# Altium PCB TFT_Adapter_Board_拼版.PcbDoc (part 6 of 9)
Units mm, origin at the board's own origin, x right, y up, seen from the top; angles counter-clockwise.
Board outline 137 x 166.56 mm, 2 copper layers (Top Layer, Bottom Layer); 80 components, 32 nets, 2615 pads, 0 vias.
Unrouted connection lines stored in the file: 1248.
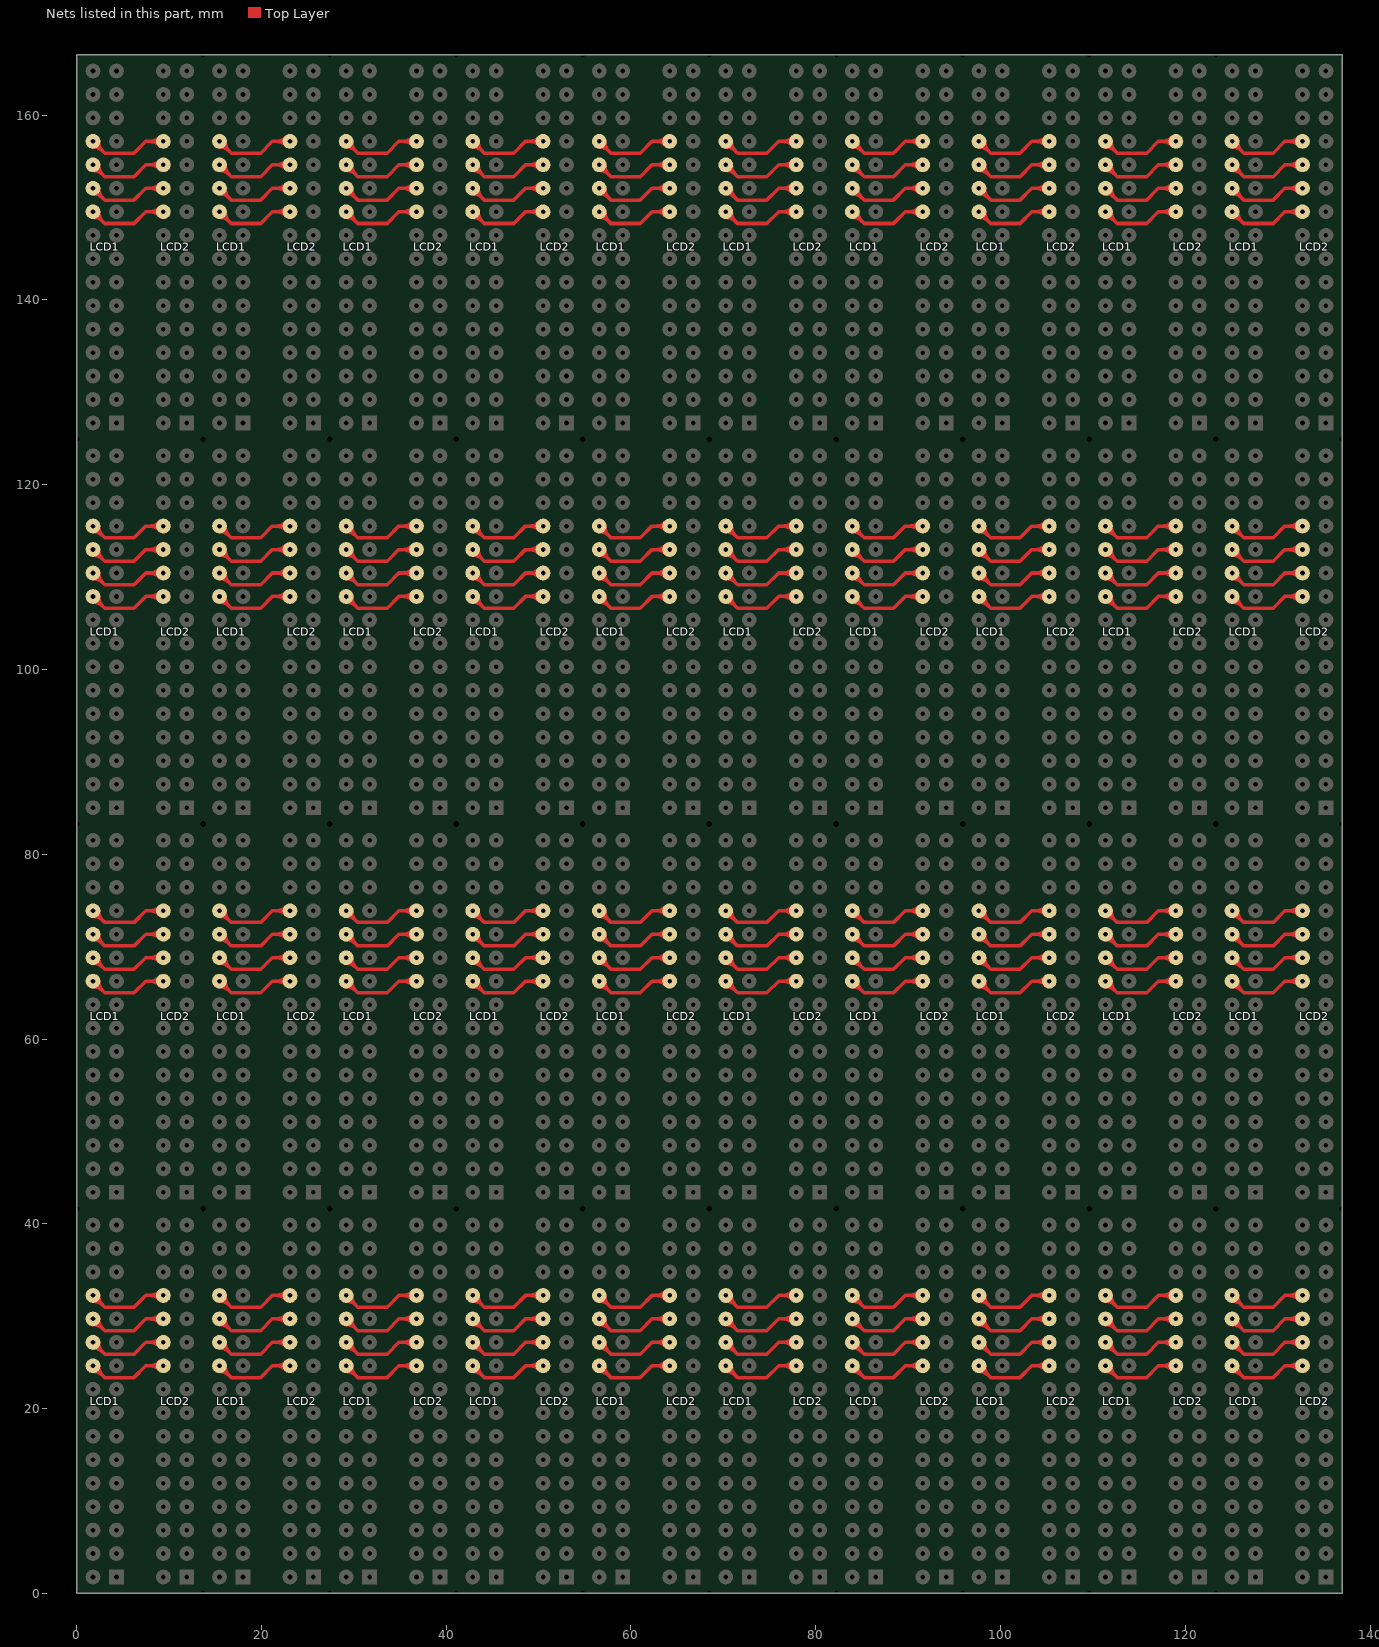
[diagram p6: the nets of this part, all layers, seen from the top]

## Nets (pads, with @x,y where several pads share a name; then routed paths per layer and width w, separated by ;. In a path a pad name is that pad's centre, name@x,y a point inside that pad or via, vN(x,y) a via of type N, cw(c..) or ccw(c..) an arc to the next point about the centre after c; other vN are vias at no path point) (continued)
NetLCD1_20: LCD1.20 LCD2.20 | length 531.8
  Top Layer w0.381: LCD1.20@1.77,31.641 cw(c1.77,30.169) 2.81,31.21 cw(c3.851,32.25) LCD1.20@2.379,32.25 ; LCD1.20@1.77,32.25 3.04,30.98 6.215,30.98 7.485,32.25 LCD2.20@9.39,32.25 ; LCD1.20@1.77,73.28 cw(c1.77,71.809) 2.81,72.85 cw(c3.851,73.89) LCD1.20@2.379,73.89 ; LCD1.20@1.77,73.89 3.04,72.62 6.215,72.62 7.485,73.89 LCD2.20@9.39,73.89 ; LCD1.20@1.77,114.92 cw(c1.77,113.449) 2.81,114.49 cw(c3.851,115.53) LCD1.20@2.379,115.53 ; LCD1.20@1.77,115.53 3.04,114.26 6.215,114.26 7.485,115.53 LCD2.20@9.39,115.53 ; LCD1.20@1.77,156.56 cw(c1.77,155.089) 2.81,156.13 cw(c3.851,157.17) LCD1.20@2.379,157.17 ; LCD1.20@1.77,157.17 3.04,155.9 6.215,155.9 7.485,157.17 LCD2.20@9.39,157.17 ; LCD2.20@8.959,31.819 ccw(c7.919,30.779) 7.919,32.25 ccw(c7.919,33.721) LCD2.20@8.959,32.681 ; LCD2.20@8.959,73.459 ccw(c7.919,72.419) 7.919,73.89 ccw(c7.919,75.361) LCD2.20@8.959,74.321 ; LCD2.20@8.959,115.099 ccw(c7.919,114.059) 7.919,115.53 ccw(c7.919,117.001) LCD2.20@8.959,115.961 ; LCD2.20@8.959,156.739 ccw(c7.919,155.699) 7.919,157.17 ccw(c7.919,158.641) LCD2.20@8.959,157.601 ; LCD1.20@15.47,31.641 cw(c15.47,30.169) 16.51,31.21 cw(c17.551,32.25) LCD1.20@16.079,32.25 ; LCD1.20@15.47,32.25 16.74,30.98 19.915,30.98 21.185,32.25 LCD2.20@23.09,32.25 ; LCD1.20@15.47,73.28 cw(c15.47,71.809) 16.51,72.85 cw(c17.551,73.89) LCD1.20@16.079,73.89 ; LCD1.20@15.47,73.89 16.74,72.62 19.915,72.62 21.185,73.89 LCD2.20@23.09,73.89 ; LCD1.20@15.47,114.92 cw(c15.47,113.449) 16.51,114.49 cw(c17.551,115.53) LCD1.20@16.079,115.53 ; LCD1.20@15.47,115.53 16.74,114.26 19.915,114.26 21.185,115.53 LCD2.20@23.09,115.53 ; LCD1.20@15.47,156.56 cw(c15.47,155.089) 16.51,156.13 cw(c17.551,157.17) LCD1.20@16.079,157.17 ; LCD1.20@15.47,157.17 16.74,155.9 19.915,155.9 21.185,157.17 LCD2.20@23.09,157.17 ; LCD2.20@22.659,31.819 ccw(c21.619,30.779) 21.619,32.25 ccw(c21.619,33.721) LCD2.20@22.659,32.681 ; LCD2.20@22.659,73.459 ccw(c21.619,72.419) 21.619,73.89 ccw(c21.619,75.361) LCD2.20@22.659,74.321 ; LCD2.20@22.659,115.099 ccw(c21.619,114.059) 21.619,115.53 ccw(c21.619,117.001) LCD2.20@22.659,115.961 ; LCD2.20@22.659,156.739 ccw(c21.619,155.699) 21.619,157.17 ccw(c21.619,158.641) LCD2.20@22.659,157.601 ; LCD1.20@29.17,31.641 cw(c29.17,30.169) 30.21,31.21 cw(c31.251,32.25) LCD1.20@29.779,32.25 ; LCD1.20@29.17,32.25 30.44,30.98 33.615,30.98 34.885,32.25 LCD2.20@36.79,32.25 ; LCD1.20@29.17,73.28 cw(c29.17,71.809) 30.21,72.85 cw(c31.251,73.89) LCD1.20@29.779,73.89 ; LCD1.20@29.17,73.89 30.44,72.62 33.615,72.62 34.885,73.89 LCD2.20@36.79,73.89 ; LCD1.20@29.17,114.92 cw(c29.17,113.449) 30.21,114.49 cw(c31.251,115.53) LCD1.20@29.779,115.53 ; LCD1.20@29.17,115.53 30.44,114.26 33.615,114.26 34.885,115.53 LCD2.20@36.79,115.53 ; LCD1.20@29.17,156.56 cw(c29.17,155.089) 30.21,156.13 cw(c31.251,157.17) LCD1.20@29.779,157.17 ; LCD1.20@29.17,157.17 30.44,155.9 33.615,155.9 34.885,157.17 LCD2.20@36.79,157.17 ; LCD2.20@36.359,31.819 ccw(c35.319,30.779) 35.319,32.25 ccw(c35.319,33.721) LCD2.20@36.359,32.681 ; LCD2.20@36.359,73.459 ccw(c35.319,72.419) 35.319,73.89 ccw(c35.319,75.361) LCD2.20@36.359,74.321 ; LCD2.20@36.359,115.099 ccw(c35.319,114.059) 35.319,115.53 ccw(c35.319,117.001) LCD2.20@36.359,115.961 ; LCD2.20@36.359,156.739 ccw(c35.319,155.699) 35.319,157.17 ccw(c35.319,158.641) LCD2.20@36.359,157.601 ; LCD1.20@42.87,31.641 cw(c42.87,30.169) 43.91,31.21 cw(c44.951,32.25) LCD1.20@43.479,32.25 ; LCD1.20@42.87,32.25 44.14,30.98 47.315,30.98 48.585,32.25 LCD2.20@50.49,32.25 ; LCD1.20@42.87,73.28 cw(c42.87,71.809) 43.91,72.85 cw(c44.951,73.89) LCD1.20@43.479,73.89 ; LCD1.20@42.87,73.89 44.14,72.62 47.315,72.62 48.585,73.89 LCD2.20@50.49,73.89 ; LCD1.20@42.87,114.92 cw(c42.87,113.449) 43.91,114.49 cw(c44.951,115.53) LCD1.20@43.479,115.53 ; LCD1.20@42.87,115.53 44.14,114.26 47.315,114.26 48.585,115.53 LCD2.20@50.49,115.53 ; LCD1.20@42.87,156.56 cw(c42.87,155.089) 43.91,156.13 cw(c44.951,157.17) LCD1.20@43.479,157.17 ; LCD1.20@42.87,157.17 44.14,155.9 47.315,155.9 48.585,157.17 LCD2.20@50.49,157.17 ; LCD2.20@50.059,31.819 ccw(c49.019,30.779) 49.019,32.25 ccw(c49.019,33.721) LCD2.20@50.059,32.681 ; LCD2.20@50.059,73.459 ccw(c49.019,72.419) 49.019,73.89 ccw(c49.019,75.361) LCD2.20@50.059,74.321 ; LCD2.20@50.059,115.099 ccw(c49.019,114.059) 49.019,115.53 ccw(c49.019,117.001) LCD2.20@50.059,115.961 ; LCD2.20@50.059,156.739 ccw(c49.019,155.699) 49.019,157.17 ccw(c49.019,158.641) LCD2.20@50.059,157.601 ; LCD1.20@56.57,31.641 cw(c56.57,30.169) 57.61,31.21 cw(c58.651,32.25) LCD1.20@57.179,32.25 ; LCD1.20@56.57,32.25 57.84,30.98 61.015,30.98 62.285,32.25 LCD2.20@64.19,32.25 ; LCD1.20@56.57,73.28 cw(c56.57,71.809) 57.61,72.85 cw(c58.651,73.89) LCD1.20@57.179,73.89 ; LCD1.20@56.57,73.89 57.84,72.62 61.015,72.62 62.285,73.89 LCD2.20@64.19,73.89 ; LCD1.20@56.57,114.92 cw(c56.57,113.449) 57.61,114.49 cw(c58.651,115.53) LCD1.20@57.179,115.53 ; LCD1.20@56.57,115.53 57.84,114.26 61.015,114.26 62.285,115.53 LCD2.20@64.19,115.53 ; LCD1.20@56.57,156.56 cw(c56.57,155.089) 57.61,156.13 cw(c58.651,157.17) LCD1.20@57.179,157.17 ; LCD1.20@56.57,157.17 57.84,155.9 61.015,155.9 62.285,157.17 LCD2.20@64.19,157.17 ; LCD2.20@63.759,31.819 ccw(c62.719,30.779) 62.719,32.25 ccw(c62.719,33.721) LCD2.20@63.759,32.681 ; LCD2.20@63.759,73.459 ccw(c62.719,72.419) 62.719,73.89 ccw(c62.719,75.361) LCD2.20@63.759,74.321 ; LCD2.20@63.759,115.099 ccw(c62.719,114.059) 62.719,115.53 ccw(c62.719,117.001) LCD2.20@63.759,115.961 ; LCD2.20@63.759,156.739 ccw(c62.719,155.699) 62.719,157.17 ccw(c62.719,158.641) LCD2.20@63.759,157.601 ; LCD1.20@70.27,31.641 cw(c70.27,30.169) 71.31,31.21 cw(c72.351,32.25) LCD1.20@70.879,32.25 ; LCD1.20@70.27,32.25 71.54,30.98 74.715,30.98 75.985,32.25 LCD2.20@77.89,32.25 ; LCD1.20@70.27,73.28 cw(c70.27,71.809) 71.31,72.85 cw(c72.351,73.89) LCD1.20@70.879,73.89 ; LCD1.20@70.27,73.89 71.54,72.62 74.715,72.62 75.985,73.89 LCD2.20@77.89,73.89 ; LCD1.20@70.27,114.92 cw(c70.27,113.449) 71.31,114.49 cw(c72.351,115.53) LCD1.20@70.879,115.53 ; LCD1.20@70.27,115.53 71.54,114.26 74.715,114.26 75.985,115.53 LCD2.20@77.89,115.53 ; LCD1.20@70.27,156.56 cw(c70.27,155.089) 71.31,156.13 cw(c72.351,157.17) LCD1.20@70.879,157.17 ; LCD1.20@70.27,157.17 71.54,155.9 74.715,155.9 75.985,157.17 LCD2.20@77.89,157.17 ; LCD2.20@77.459,31.819 ccw(c76.419,30.779) 76.419,32.25 ccw(c76.419,33.721) LCD2.20@77.459,32.681 ; LCD2.20@77.459,73.459 ccw(c76.419,72.419) 76.419,73.89 ccw(c76.419,75.361) LCD2.20@77.459,74.321 ; LCD2.20@77.459,115.099 ccw(c76.419,114.059) 76.419,115.53 ccw(c76.419,117.001) LCD2.20@77.459,115.961 ; LCD2.20@77.459,156.739 ccw(c76.419,155.699) 76.419,157.17 ccw(c76.419,158.641) LCD2.20@77.459,157.601 ; LCD1.20@83.97,31.641 cw(c83.97,30.169) 85.01,31.21 cw(c86.051,32.25) LCD1.20@84.579,32.25 ; LCD1.20@83.97,32.25 85.24,30.98 88.415,30.98 89.685,32.25 LCD2.20@91.59,32.25 ; LCD1.20@83.97,73.28 cw(c83.97,71.809) 85.01,72.85 cw(c86.051,73.89) LCD1.20@84.579,73.89 ; LCD1.20@83.97,73.89 85.24,72.62 88.415,72.62 89.685,73.89 LCD2.20@91.59,73.89 ; LCD1.20@83.97,114.92 cw(c83.97,113.449) 85.01,114.49 cw(c86.051,115.53) LCD1.20@84.579,115.53 ; LCD1.20@83.97,115.53 85.24,114.26 88.415,114.26 89.685,115.53 LCD2.20@91.59,115.53 ; LCD1.20@83.97,156.56 cw(c83.97,155.089) 85.01,156.13 cw(c86.051,157.17) LCD1.20@84.579,157.17 ; LCD1.20@83.97,157.17 85.24,155.9 88.415,155.9 89.685,157.17 LCD2.20@91.59,157.17 ; LCD2.20@91.159,31.819 ccw(c90.119,30.779) 90.119,32.25 ccw(c90.119,33.721) LCD2.20@91.159,32.681 ; LCD2.20@91.159,73.459 ccw(c90.119,72.419) 90.119,73.89 ccw(c90.119,75.361) LCD2.20@91.159,74.321 ; LCD2.20@91.159,115.099 ccw(c90.119,114.059) 90.119,115.53 ccw(c90.119,117.001) LCD2.20@91.159,115.961 ; LCD2.20@91.159,156.739 ccw(c90.119,155.699) 90.119,157.17 ccw(c90.119,158.641) LCD2.20@91.159,157.601 ; LCD1.20@97.67,31.641 cw(c97.67,30.169) 98.71,31.21 cw(c99.751,32.25) LCD1.20@98.279,32.25 ; LCD1.20@97.67,32.25 98.94,30.98 102.115,30.98 103.385,32.25 LCD2.20@105.29,32.25 ; LCD1.20@97.67,73.28 cw(c97.67,71.809) 98.71,72.85 cw(c99.751,73.89) LCD1.20@98.279,73.89 ; LCD1.20@97.67,73.89 98.94,72.62 102.115,72.62 103.385,73.89 LCD2.20@105.29,73.89 ; LCD1.20@97.67,114.92 cw(c97.67,113.449) 98.71,114.49 cw(c99.751,115.53) LCD1.20@98.279,115.53 ; LCD1.20@97.67,115.53 98.94,114.26 102.115,114.26 103.385,115.53 LCD2.20@105.29,115.53 ; LCD1.20@97.67,156.56 cw(c97.67,155.089) 98.71,156.13 cw(c99.751,157.17) LCD1.20@98.279,157.17 ; LCD1.20@97.67,157.17 98.94,155.9 102.115,155.9 103.385,157.17 LCD2.20@105.29,157.17 ; LCD2.20@104.859,31.819 ccw(c103.819,30.779) 103.819,32.25 ccw(c103.819,33.721) LCD2.20@104.859,32.681 ; LCD2.20@104.859,73.459 ccw(c103.819,72.419) 103.819,73.89 ccw(c103.819,75.361) LCD2.20@104.859,74.321 ; LCD2.20@104.859,115.099 ccw(c103.819,114.059) 103.819,115.53 ccw(c103.819,117.001) LCD2.20@104.859,115.961 ; LCD2.20@104.859,156.739 ccw(c103.819,155.699) 103.819,157.17 ccw(c103.819,158.641) LCD2.20@104.859,157.601 ; LCD1.20@111.37,31.641 cw(c111.37,30.169) 112.41,31.21 cw(c113.451,32.25) LCD1.20@111.979,32.25 ; LCD1.20@111.37,32.25 112.64,30.98 115.815,30.98 117.085,32.25 LCD2.20@118.99,32.25 ; LCD1.20@111.37,73.28 cw(c111.37,71.809) 112.41,72.85 cw(c113.451,73.89) LCD1.20@111.979,73.89 ; LCD1.20@111.37,73.89 112.64,72.62 115.815,72.62 117.085,73.89 LCD2.20@118.99,73.89 ; LCD1.20@111.37,114.92 cw(c111.37,113.449) 112.41,114.49 cw(c113.451,115.53) LCD1.20@111.979,115.53 ; LCD1.20@111.37,115.53 112.64,114.26 115.815,114.26 117.085,115.53 LCD2.20@118.99,115.53 ; LCD1.20@111.37,156.56 cw(c111.37,155.089) 112.41,156.13 cw(c113.451,157.17) LCD1.20@111.979,157.17 ; LCD1.20@111.37,157.17 112.64,155.9 115.815,155.9 117.085,157.17 LCD2.20@118.99,157.17 ; LCD2.20@118.559,31.819 ccw(c117.519,30.779) 117.519,32.25 ccw(c117.519,33.721) LCD2.20@118.559,32.681 ; LCD2.20@118.559,73.459 ccw(c117.519,72.419) 117.519,73.89 ccw(c117.519,75.361) LCD2.20@118.559,74.321 ; LCD2.20@118.559,115.099 ccw(c117.519,114.059) 117.519,115.53 ccw(c117.519,117.001) LCD2.20@118.559,115.961 ; LCD2.20@118.559,156.739 ccw(c117.519,155.699) 117.519,157.17 ccw(c117.519,158.641) LCD2.20@118.559,157.601 ; LCD1.20@125.07,31.641 cw(c125.07,30.169) 126.11,31.21 cw(c127.151,32.25) LCD1.20@125.679,32.25 ; LCD1.20@125.07,32.25 126.34,30.98 129.515,30.98 130.785,32.25 LCD2.20@132.69,32.25 ; LCD1.20@125.07,73.28 cw(c125.07,71.809) 126.11,72.85 cw(c127.151,73.89) LCD1.20@125.679,73.89 ; LCD1.20@125.07,73.89 126.34,72.62 129.515,72.62 130.785,73.89 LCD2.20@132.69,73.89 ; LCD1.20@125.07,114.92 cw(c125.07,113.449) 126.11,114.49 cw(c127.151,115.53) LCD1.20@125.679,115.53 ; LCD1.20@125.07,115.53 126.34,114.26 129.515,114.26 130.785,115.53 LCD2.20@132.69,115.53 ; LCD1.20@125.07,156.56 cw(c125.07,155.089) 126.11,156.13 cw(c127.151,157.17) LCD1.20@125.679,157.17 ; LCD1.20@125.07,157.17 126.34,155.9 129.515,155.9 130.785,157.17 LCD2.20@132.69,157.17 ; LCD2.20@132.259,31.819 ccw(c131.219,30.779) 131.219,32.25 ccw(c131.219,33.721) LCD2.20@132.259,32.681 ; LCD2.20@132.259,73.459 ccw(c131.219,72.419) 131.219,73.89 ccw(c131.219,75.361) LCD2.20@132.259,74.321 ; LCD2.20@132.259,115.099 ccw(c131.219,114.059) 131.219,115.53 ccw(c131.219,117.001) LCD2.20@132.259,115.961 ; LCD2.20@132.259,156.739 ccw(c131.219,155.699) 131.219,157.17 ccw(c131.219,158.641) LCD2.20@132.259,157.601
NetLCD1_21: LCD1.21 LCD2.21 | length 531.8
  Top Layer w0.381: LCD1.21@1.77,29.101 cw(c1.77,27.629) 2.81,28.67 cw(c3.851,29.71) LCD1.21@2.379,29.71 ; LCD1.21@1.77,29.71 3.04,28.44 6.215,28.44 7.485,29.71 LCD2.21@9.39,29.71 ; LCD1.21@1.77,70.74 cw(c1.77,69.269) 2.81,70.31 cw(c3.851,71.35) LCD1.21@2.379,71.35 ; LCD1.21@1.77,71.35 3.04,70.08 6.215,70.08 7.485,71.35 LCD2.21@9.39,71.35 ; LCD1.21@1.77,112.38 cw(c1.77,110.909) 2.81,111.95 cw(c3.851,112.99) LCD1.21@2.379,112.99 ; LCD1.21@1.77,112.99 3.04,111.72 6.215,111.72 7.485,112.99 LCD2.21@9.39,112.99 ; LCD1.21@1.77,154.02 cw(c1.77,152.549) 2.81,153.59 cw(c3.851,154.63) LCD1.21@2.379,154.63 ; LCD1.21@1.77,154.63 3.04,153.36 6.215,153.36 7.485,154.63 LCD2.21@9.39,154.63 ; LCD2.21@8.959,29.279 ccw(c7.919,28.239) 7.919,29.71 ccw(c7.919,31.181) LCD2.21@8.959,30.141 ; LCD2.21@8.959,70.919 ccw(c7.919,69.879) 7.919,71.35 ccw(c7.919,72.821) LCD2.21@8.959,71.781 ; LCD2.21@8.959,112.559 ccw(c7.919,111.519) 7.919,112.99 ccw(c7.919,114.461) LCD2.21@8.959,113.421 ; LCD2.21@8.959,154.199 ccw(c7.919,153.159) 7.919,154.63 ccw(c7.919,156.101) LCD2.21@8.959,155.061 ; LCD1.21@15.47,29.101 cw(c15.47,27.629) 16.51,28.67 cw(c17.551,29.71) LCD1.21@16.079,29.71 ; LCD1.21@15.47,29.71 16.74,28.44 19.915,28.44 21.185,29.71 LCD2.21@23.09,29.71 ; LCD1.21@15.47,70.74 cw(c15.47,69.269) 16.51,70.31 cw(c17.551,71.35) LCD1.21@16.079,71.35 ; LCD1.21@15.47,71.35 16.74,70.08 19.915,70.08 21.185,71.35 LCD2.21@23.09,71.35 ; LCD1.21@15.47,112.38 cw(c15.47,110.909) 16.51,111.95 cw(c17.551,112.99) LCD1.21@16.079,112.99 ; LCD1.21@15.47,112.99 16.74,111.72 19.915,111.72 21.185,112.99 LCD2.21@23.09,112.99 ; LCD1.21@15.47,154.02 cw(c15.47,152.549) 16.51,153.59 cw(c17.551,154.63) LCD1.21@16.079,154.63 ; LCD1.21@15.47,154.63 16.74,153.36 19.915,153.36 21.185,154.63 LCD2.21@23.09,154.63 ; LCD2.21@22.659,29.279 ccw(c21.619,28.239) 21.619,29.71 ccw(c21.619,31.181) LCD2.21@22.659,30.141 ; LCD2.21@22.659,70.919 ccw(c21.619,69.879) 21.619,71.35 ccw(c21.619,72.821) LCD2.21@22.659,71.781 ; LCD2.21@22.659,112.559 ccw(c21.619,111.519) 21.619,112.99 ccw(c21.619,114.461) LCD2.21@22.659,113.421 ; LCD2.21@22.659,154.199 ccw(c21.619,153.159) 21.619,154.63 ccw(c21.619,156.101) LCD2.21@22.659,155.061 ; LCD1.21@29.17,29.101 cw(c29.17,27.629) 30.21,28.67 cw(c31.251,29.71) LCD1.21@29.779,29.71 ; LCD1.21@29.17,29.71 30.44,28.44 33.615,28.44 34.885,29.71 LCD2.21@36.79,29.71 ; LCD1.21@29.17,70.74 cw(c29.17,69.269) 30.21,70.31 cw(c31.251,71.35) LCD1.21@29.779,71.35 ; LCD1.21@29.17,71.35 30.44,70.08 33.615,70.08 34.885,71.35 LCD2.21@36.79,71.35 ; LCD1.21@29.17,112.38 cw(c29.17,110.909) 30.21,111.95 cw(c31.251,112.99) LCD1.21@29.779,112.99 ; LCD1.21@29.17,112.99 30.44,111.72 33.615,111.72 34.885,112.99 LCD2.21@36.79,112.99 ; LCD1.21@29.17,154.02 cw(c29.17,152.549) 30.21,153.59 cw(c31.251,154.63) LCD1.21@29.779,154.63 ; LCD1.21@29.17,154.63 30.44,153.36 33.615,153.36 34.885,154.63 LCD2.21@36.79,154.63 ; LCD2.21@36.359,29.279 ccw(c35.319,28.239) 35.319,29.71 ccw(c35.319,31.181) LCD2.21@36.359,30.141 ; LCD2.21@36.359,70.919 ccw(c35.319,69.879) 35.319,71.35 ccw(c35.319,72.821) LCD2.21@36.359,71.781 ; LCD2.21@36.359,112.559 ccw(c35.319,111.519) 35.319,112.99 ccw(c35.319,114.461) LCD2.21@36.359,113.421 ; LCD2.21@36.359,154.199 ccw(c35.319,153.159) 35.319,154.63 ccw(c35.319,156.101) LCD2.21@36.359,155.061 ; LCD1.21@42.87,29.101 cw(c42.87,27.629) 43.91,28.67 cw(c44.951,29.71) LCD1.21@43.479,29.71 ; LCD1.21@42.87,29.71 44.14,28.44 47.315,28.44 48.585,29.71 LCD2.21@50.49,29.71 ; LCD1.21@42.87,70.74 cw(c42.87,69.269) 43.91,70.31 cw(c44.951,71.35) LCD1.21@43.479,71.35 ; LCD1.21@42.87,71.35 44.14,70.08 47.315,70.08 48.585,71.35 LCD2.21@50.49,71.35 ; LCD1.21@42.87,112.38 cw(c42.87,110.909) 43.91,111.95 cw(c44.951,112.99) LCD1.21@43.479,112.99 ; LCD1.21@42.87,112.99 44.14,111.72 47.315,111.72 48.585,112.99 LCD2.21@50.49,112.99 ; LCD1.21@42.87,154.02 cw(c42.87,152.549) 43.91,153.59 cw(c44.951,154.63) LCD1.21@43.479,154.63 ; LCD1.21@42.87,154.63 44.14,153.36 47.315,153.36 48.585,154.63 LCD2.21@50.49,154.63 ; LCD2.21@50.059,29.279 ccw(c49.019,28.239) 49.019,29.71 ccw(c49.019,31.181) LCD2.21@50.059,30.141 ; LCD2.21@50.059,70.919 ccw(c49.019,69.879) 49.019,71.35 ccw(c49.019,72.821) LCD2.21@50.059,71.781 ; LCD2.21@50.059,112.559 ccw(c49.019,111.519) 49.019,112.99 ccw(c49.019,114.461) LCD2.21@50.059,113.421 ; LCD2.21@50.059,154.199 ccw(c49.019,153.159) 49.019,154.63 ccw(c49.019,156.101) LCD2.21@50.059,155.061 ; LCD1.21@56.57,29.101 cw(c56.57,27.629) 57.61,28.67 cw(c58.651,29.71) LCD1.21@57.179,29.71 ; LCD1.21@56.57,29.71 57.84,28.44 61.015,28.44 62.285,29.71 LCD2.21@64.19,29.71 ; LCD1.21@56.57,70.74 cw(c56.57,69.269) 57.61,70.31 cw(c58.651,71.35) LCD1.21@57.179,71.35 ; LCD1.21@56.57,71.35 57.84,70.08 61.015,70.08 62.285,71.35 LCD2.21@64.19,71.35 ; LCD1.21@56.57,112.38 cw(c56.57,110.909) 57.61,111.95 cw(c58.651,112.99) LCD1.21@57.179,112.99 ; LCD1.21@56.57,112.99 57.84,111.72 61.015,111.72 62.285,112.99 LCD2.21@64.19,112.99 ; LCD1.21@56.57,154.02 cw(c56.57,152.549) 57.61,153.59 cw(c58.651,154.63) LCD1.21@57.179,154.63 ; LCD1.21@56.57,154.63 57.84,153.36 61.015,153.36 62.285,154.63 LCD2.21@64.19,154.63 ; LCD2.21@63.759,29.279 ccw(c62.719,28.239) 62.719,29.71 ccw(c62.719,31.181) LCD2.21@63.759,30.141 ; LCD2.21@63.759,70.919 ccw(c62.719,69.879) 62.719,71.35 ccw(c62.719,72.821) LCD2.21@63.759,71.781 ; LCD2.21@63.759,112.559 ccw(c62.719,111.519) 62.719,112.99 ccw(c62.719,114.461) LCD2.21@63.759,113.421 ; LCD2.21@63.759,154.199 ccw(c62.719,153.159) 62.719,154.63 ccw(c62.719,156.101) LCD2.21@63.759,155.061 ; LCD1.21@70.27,29.101 cw(c70.27,27.629) 71.31,28.67 cw(c72.351,29.71) LCD1.21@70.879,29.71 ; LCD1.21@70.27,29.71 71.54,28.44 74.715,28.44 75.985,29.71 LCD2.21@77.89,29.71 ; LCD1.21@70.27,70.74 cw(c70.27,69.269) 71.31,70.31 cw(c72.351,71.35) LCD1.21@70.879,71.35 ; LCD1.21@70.27,71.35 71.54,70.08 74.715,70.08 75.985,71.35 LCD2.21@77.89,71.35 ; LCD1.21@70.27,112.38 cw(c70.27,110.909) 71.31,111.95 cw(c72.351,112.99) LCD1.21@70.879,112.99 ; LCD1.21@70.27,112.99 71.54,111.72 74.715,111.72 75.985,112.99 LCD2.21@77.89,112.99 ; LCD1.21@70.27,154.02 cw(c70.27,152.549) 71.31,153.59 cw(c72.351,154.63) LCD1.21@70.879,154.63 ; LCD1.21@70.27,154.63 71.54,153.36 74.715,153.36 75.985,154.63 LCD2.21@77.89,154.63 ; LCD2.21@77.459,29.279 ccw(c76.419,28.239) 76.419,29.71 ccw(c76.419,31.181) LCD2.21@77.459,30.141 ; LCD2.21@77.459,70.919 ccw(c76.419,69.879) 76.419,71.35 ccw(c76.419,72.821) LCD2.21@77.459,71.781 ; LCD2.21@77.459,112.559 ccw(c76.419,111.519) 76.419,112.99 ccw(c76.419,114.461) LCD2.21@77.459,113.421 ; LCD2.21@77.459,154.199 ccw(c76.419,153.159) 76.419,154.63 ccw(c76.419,156.101) LCD2.21@77.459,155.061 ; LCD1.21@83.97,29.101 cw(c83.97,27.629) 85.01,28.67 cw(c86.051,29.71) LCD1.21@84.579,29.71 ; LCD1.21@83.97,29.71 85.24,28.44 88.415,28.44 89.685,29.71 LCD2.21@91.59,29.71 ; LCD1.21@83.97,70.74 cw(c83.97,69.269) 85.01,70.31 cw(c86.051,71.35) LCD1.21@84.579,71.35 ; LCD1.21@83.97,71.35 85.24,70.08 88.415,70.08 89.685,71.35 LCD2.21@91.59,71.35 ; LCD1.21@83.97,112.38 cw(c83.97,110.909) 85.01,111.95 cw(c86.051,112.99) LCD1.21@84.579,112.99 ; LCD1.21@83.97,112.99 85.24,111.72 88.415,111.72 89.685,112.99 LCD2.21@91.59,112.99 ; LCD1.21@83.97,154.02 cw(c83.97,152.549) 85.01,153.59 cw(c86.051,154.63) LCD1.21@84.579,154.63 ; LCD1.21@83.97,154.63 85.24,153.36 88.415,153.36 89.685,154.63 LCD2.21@91.59,154.63 ; LCD2.21@91.159,29.279 ccw(c90.119,28.239) 90.119,29.71 ccw(c90.119,31.181) LCD2.21@91.159,30.141 ; LCD2.21@91.159,70.919 ccw(c90.119,69.879) 90.119,71.35 ccw(c90.119,72.821) LCD2.21@91.159,71.781 ; LCD2.21@91.159,112.559 ccw(c90.119,111.519) 90.119,112.99 ccw(c90.119,114.461) LCD2.21@91.159,113.421 ; LCD2.21@91.159,154.199 ccw(c90.119,153.159) 90.119,154.63 ccw(c90.119,156.101) LCD2.21@91.159,155.061 ; LCD1.21@97.67,29.101 cw(c97.67,27.629) 98.71,28.67 cw(c99.751,29.71) LCD1.21@98.279,29.71 ; LCD1.21@97.67,29.71 98.94,28.44 102.115,28.44 103.385,29.71 LCD2.21@105.29,29.71 ; LCD1.21@97.67,70.74 cw(c97.67,69.269) 98.71,70.31 cw(c99.751,71.35) LCD1.21@98.279,71.35 ; LCD1.21@97.67,71.35 98.94,70.08 102.115,70.08 103.385,71.35 LCD2.21@105.29,71.35 ; LCD1.21@97.67,112.38 cw(c97.67,110.909) 98.71,111.95 cw(c99.751,112.99) LCD1.21@98.279,112.99 ; LCD1.21@97.67,112.99 98.94,111.72 102.115,111.72 103.385,112.99 LCD2.21@105.29,112.99 ; LCD1.21@97.67,154.02 cw(c97.67,152.549) 98.71,153.59 cw(c99.751,154.63) LCD1.21@98.279,154.63 ; LCD1.21@97.67,154.63 98.94,153.36 102.115,153.36 103.385,154.63 LCD2.21@105.29,154.63 ; LCD2.21@104.859,29.279 ccw(c103.819,28.239) 103.819,29.71 ccw(c103.819,31.181) LCD2.21@104.859,30.141 ; LCD2.21@104.859,70.919 ccw(c103.819,69.879) 103.819,71.35 ccw(c103.819,72.821) LCD2.21@104.859,71.781 ; LCD2.21@104.859,112.559 ccw(c103.819,111.519) 103.819,112.99 ccw(c103.819,114.461) LCD2.21@104.859,113.421 ; LCD2.21@104.859,154.199 ccw(c103.819,153.159) 103.819,154.63 ccw(c103.819,156.101) LCD2.21@104.859,155.061 ; LCD1.21@111.37,29.101 cw(c111.37,27.629) 112.41,28.67 cw(c113.451,29.71) LCD1.21@111.979,29.71 ; LCD1.21@111.37,29.71 112.64,28.44 115.815,28.44 117.085,29.71 LCD2.21@118.99,29.71 ; LCD1.21@111.37,70.74 cw(c111.37,69.269) 112.41,70.31 cw(c113.451,71.35) LCD1.21@111.979,71.35 ; LCD1.21@111.37,71.35 112.64,70.08 115.815,70.08 117.085,71.35 LCD2.21@118.99,71.35 ; LCD1.21@111.37,112.38 cw(c111.37,110.909) 112.41,111.95 cw(c113.451,112.99) LCD1.21@111.979,112.99 ; LCD1.21@111.37,112.99 112.64,111.72 115.815,111.72 117.085,112.99 LCD2.21@118.99,112.99 ; LCD1.21@111.37,154.02 cw(c111.37,152.549) 112.41,153.59 cw(c113.451,154.63) LCD1.21@111.979,154.63 ; LCD1.21@111.37,154.63 112.64,153.36 115.815,153.36 117.085,154.63 LCD2.21@118.99,154.63 ; LCD2.21@118.559,29.279 ccw(c117.519,28.239) 117.519,29.71 ccw(c117.519,31.181) LCD2.21@118.559,30.141 ; LCD2.21@118.559,70.919 ccw(c117.519,69.879) 117.519,71.35 ccw(c117.519,72.821) LCD2.21@118.559,71.781 ; LCD2.21@118.559,112.559 ccw(c117.519,111.519) 117.519,112.99 ccw(c117.519,114.461) LCD2.21@118.559,113.421 ; LCD2.21@118.559,154.199 ccw(c117.519,153.159) 117.519,154.63 ccw(c117.519,156.101) LCD2.21@118.559,155.061 ; LCD1.21@125.07,29.101 cw(c125.07,27.629) 126.11,28.67 cw(c127.151,29.71) LCD1.21@125.679,29.71 ; LCD1.21@125.07,29.71 126.34,28.44 129.515,28.44 130.785,29.71 LCD2.21@132.69,29.71 ; LCD1.21@125.07,70.74 cw(c125.07,69.269) 126.11,70.31 cw(c127.151,71.35) LCD1.21@125.679,71.35 ; LCD1.21@125.07,71.35 126.34,70.08 129.515,70.08 130.785,71.35 LCD2.21@132.69,71.35 ; LCD1.21@125.07,112.38 cw(c125.07,110.909) 126.11,111.95 cw(c127.151,112.99) LCD1.21@125.679,112.99 ; LCD1.21@125.07,112.99 126.34,111.72 129.515,111.72 130.785,112.99 LCD2.21@132.69,112.99 ; LCD1.21@125.07,154.02 cw(c125.07,152.549) 126.11,153.59 cw(c127.151,154.63) LCD1.21@125.679,154.63 ; LCD1.21@125.07,154.63 126.34,153.36 129.515,153.36 130.785,154.63 LCD2.21@132.69,154.63 ; LCD2.21@132.259,29.279 ccw(c131.219,28.239) 131.219,29.71 ccw(c131.219,31.181) LCD2.21@132.259,30.141 ; LCD2.21@132.259,70.919 ccw(c131.219,69.879) 131.219,71.35 ccw(c131.219,72.821) LCD2.21@132.259,71.781 ; LCD2.21@132.259,112.559 ccw(c131.219,111.519) 131.219,112.99 ccw(c131.219,114.461) LCD2.21@132.259,113.421 ; LCD2.21@132.259,154.199 ccw(c131.219,153.159) 131.219,154.63 ccw(c131.219,156.101) LCD2.21@132.259,155.061
NetLCD1_22: LCD1.22 LCD2.22 | length 531.8
  Top Layer w0.381: LCD1.22@1.77,26.561 cw(c1.77,25.089) 2.81,26.13 cw(c3.851,27.17) LCD1.22@2.379,27.17 ; LCD1.22@1.77,27.17 3.04,25.9 6.215,25.9 7.485,27.17 LCD2.22@9.39,27.17 ; LCD1.22@1.77,68.2 cw(c1.77,66.729) 2.81,67.77 cw(c3.851,68.81) LCD1.22@2.379,68.81 ; LCD1.22@1.77,68.81 3.04,67.54 6.215,67.54 7.485,68.81 LCD2.22@9.39,68.81 ; LCD1.22@1.77,109.84 cw(c1.77,108.369) 2.81,109.41 cw(c3.851,110.45) LCD1.22@2.379,110.45 ; LCD1.22@1.77,110.45 3.04,109.18 6.215,109.18 7.485,110.45 LCD2.22@9.39,110.45 ; LCD1.22@1.77,151.48 cw(c1.77,150.009) 2.81,151.05 cw(c3.851,152.09) LCD1.22@2.379,152.09 ; LCD1.22@1.77,152.09 3.04,150.82 6.215,150.82 7.485,152.09 LCD2.22@9.39,152.09 ; LCD2.22@8.959,26.739 ccw(c7.919,25.699) 7.919,27.17 ccw(c7.919,28.641) LCD2.22@8.959,27.601 ; LCD2.22@8.959,68.379 ccw(c7.919,67.339) 7.919,68.81 ccw(c7.919,70.281) LCD2.22@8.959,69.241 ; LCD2.22@8.959,110.019 ccw(c7.919,108.979) 7.919,110.45 ccw(c7.919,111.921) LCD2.22@8.959,110.881 ; LCD2.22@8.959,151.659 ccw(c7.919,150.619) 7.919,152.09 ccw(c7.919,153.561) LCD2.22@8.959,152.521 ; LCD1.22@15.47,26.561 cw(c15.47,25.089) 16.51,26.13 cw(c17.551,27.17) LCD1.22@16.079,27.17 ; LCD1.22@15.47,27.17 16.74,25.9 19.915,25.9 21.185,27.17 LCD2.22@23.09,27.17 ; LCD1.22@15.47,68.2 cw(c15.47,66.729) 16.51,67.77 cw(c17.551,68.81) LCD1.22@16.079,68.81 ; LCD1.22@15.47,68.81 16.74,67.54 19.915,67.54 21.185,68.81 LCD2.22@23.09,68.81 ; LCD1.22@15.47,109.84 cw(c15.47,108.369) 16.51,109.41 cw(c17.551,110.45) LCD1.22@16.079,110.45 ; LCD1.22@15.47,110.45 16.74,109.18 19.915,109.18 21.185,110.45 LCD2.22@23.09,110.45 ; LCD1.22@15.47,151.48 cw(c15.47,150.009) 16.51,151.05 cw(c17.551,152.09) LCD1.22@16.079,152.09 ; LCD1.22@15.47,152.09 16.74,150.82 19.915,150.82 21.185,152.09 LCD2.22@23.09,152.09 ; LCD2.22@22.659,26.739 ccw(c21.619,25.699) 21.619,27.17 ccw(c21.619,28.641) LCD2.22@22.659,27.601 ; LCD2.22@22.659,68.379 ccw(c21.619,67.339) 21.619,68.81 ccw(c21.619,70.281) LCD2.22@22.659,69.241 ; LCD2.22@22.659,110.019 ccw(c21.619,108.979) 21.619,110.45 ccw(c21.619,111.921) LCD2.22@22.659,110.881 ; LCD2.22@22.659,151.659 ccw(c21.619,150.619) 21.619,152.09 ccw(c21.619,153.561) LCD2.22@22.659,152.521 ; LCD1.22@29.17,26.561 cw(c29.17,25.089) 30.21,26.13 cw(c31.251,27.17) LCD1.22@29.779,27.17 ; LCD1.22@29.17,27.17 30.44,25.9 33.615,25.9 34.885,27.17 LCD2.22@36.79,27.17 ; LCD1.22@29.17,68.2 cw(c29.17,66.729) 30.21,67.77 cw(c31.251,68.81) LCD1.22@29.779,68.81 ; LCD1.22@29.17,68.81 30.44,67.54 33.615,67.54 34.885,68.81 LCD2.22@36.79,68.81 ; LCD1.22@29.17,109.84 cw(c29.17,108.369) 30.21,109.41 cw(c31.251,110.45) LCD1.22@29.779,110.45 ; LCD1.22@29.17,110.45 30.44,109.18 33.615,109.18 34.885,110.45 LCD2.22@36.79,110.45 ; LCD1.22@29.17,151.48 cw(c29.17,150.009) 30.21,151.05 cw(c31.251,152.09) LCD1.22@29.779,152.09 ; LCD1.22@29.17,152.09 30.44,150.82 33.615,150.82 34.885,152.09 LCD2.22@36.79,152.09 ; LCD2.22@36.359,26.739 ccw(c35.319,25.699) 35.319,27.17 ccw(c35.319,28.641) LCD2.22@36.359,27.601 ; LCD2.22@36.359,68.379 ccw(c35.319,67.339) 35.319,68.81 ccw(c35.319,70.281) LCD2.22@36.359,69.241 ; LCD2.22@36.359,110.019 ccw(c35.319,108.979) 35.319,110.45 ccw(c35.319,111.921) LCD2.22@36.359,110.881 ; LCD2.22@36.359,151.659 ccw(c35.319,150.619) 35.319,152.09 ccw(c35.319,153.561) LCD2.22@36.359,152.521 ; LCD1.22@42.87,26.561 cw(c42.87,25.089) 43.91,26.13 cw(c44.951,27.17) LCD1.22@43.479,27.17 ; LCD1.22@42.87,27.17 44.14,25.9 47.315,25.9 48.585,27.17 LCD2.22@50.49,27.17 ; LCD1.22@42.87,68.2 cw(c42.87,66.729) 43.91,67.77 cw(c44.951,68.81) LCD1.22@43.479,68.81 ; LCD1.22@42.87,68.81 44.14,67.54 47.315,67.54 48.585,68.81 LCD2.22@50.49,68.81 ; LCD1.22@42.87,109.84 cw(c42.87,108.369) 43.91,109.41 cw(c44.951,110.45) LCD1.22@43.479,110.45 ; LCD1.22@42.87,110.45 44.14,109.18 47.315,109.18 48.585,110.45 LCD2.22@50.49,110.45 ; LCD1.22@42.87,151.48 cw(c42.87,150.009) 43.91,151.05 cw(c44.951,152.09) LCD1.22@43.479,152.09 ; LCD1.22@42.87,152.09 44.14,150.82 47.315,150.82 48.585,152.09 LCD2.22@50.49,152.09 ; LCD2.22@50.059,26.739 ccw(c49.019,25.699) 49.019,27.17 ccw(c49.019,28.641) LCD2.22@50.059,27.601 ; LCD2.22@50.059,68.379 ccw(c49.019,67.339) 49.019,68.81 ccw(c49.019,70.281) LCD2.22@50.059,69.241 ; LCD2.22@50.059,110.019 ccw(c49.019,108.979) 49.019,110.45 ccw(c49.019,111.921) LCD2.22@50.059,110.881 ; LCD2.22@50.059,151.659 ccw(c49.019,150.619) 49.019,152.09 ccw(c49.019,153.561) LCD2.22@50.059,152.521 ; LCD1.22@56.57,26.561 cw(c56.57,25.089) 57.61,26.13 cw(c58.651,27.17) LCD1.22@57.179,27.17 ; LCD1.22@56.57,27.17 57.84,25.9 61.015,25.9 62.285,27.17 LCD2.22@64.19,27.17 ; LCD1.22@56.57,68.2 cw(c56.57,66.729) 57.61,67.77 cw(c58.651,68.81) LCD1.22@57.179,68.81 ; LCD1.22@56.57,68.81 57.84,67.54 61.015,67.54 62.285,68.81 LCD2.22@64.19,68.81 ; LCD1.22@56.57,109.84 cw(c56.57,108.369) 57.61,109.41 cw(c58.651,110.45) LCD1.22@57.179,110.45 ; LCD1.22@56.57,110.45 57.84,109.18 61.015,109.18 62.285,110.45 LCD2.22@64.19,110.45 ; LCD1.22@56.57,151.48 cw(c56.57,150.009) 57.61,151.05 cw(c58.651,152.09) LCD1.22@57.179,152.09 ; LCD1.22@56.57,152.09 57.84,150.82 61.015,150.82 62.285,152.09 LCD2.22@64.19,152.09 ; LCD2.22@63.759,26.739 ccw(c62.719,25.699) 62.719,27.17 ccw(c62.719,28.641) LCD2.22@63.759,27.601 ; LCD2.22@63.759,68.379 ccw(c62.719,67.339) 62.719,68.81 ccw(c62.719,70.281) LCD2.22@63.759,69.241 ; LCD2.22@63.759,110.019 ccw(c62.719,108.979) 62.719,110.45 ccw(c62.719,111.921) LCD2.22@63.759,110.881 ; LCD2.22@63.759,151.659 ccw(c62.719,150.619) 62.719,152.09 ccw(c62.719,153.561) LCD2.22@63.759,152.521 ; LCD1.22@70.27,26.561 cw(c70.27,25.089) 71.31,26.13 cw(c72.351,27.17) LCD1.22@70.879,27.17 ; LCD1.22@70.27,27.17 71.54,25.9 74.715,25.9 75.985,27.17 LCD2.22@77.89,27.17 ; LCD1.22@70.27,68.2 cw(c70.27,66.729) 71.31,67.77 cw(c72.351,68.81) LCD1.22@70.879,68.81 ; LCD1.22@70.27,68.81 71.54,67.54 74.715,67.54 75.985,68.81 LCD2.22@77.89,68.81 ; LCD1.22@70.27,109.84 cw(c70.27,108.369) 71.31,109.41 cw(c72.351,110.45) LCD1.22@70.879,110.45 ; LCD1.22@70.27,110.45 71.54,109.18 74.715,109.18 75.985,110.45 LCD2.22@77.89,110.45 ; LCD1.22@70.27,151.48 cw(c70.27,150.009) 71.31,151.05 cw(c72.351,152.09) LCD1.22@70.879,152.09 ; LCD1.22@70.27,152.09 71.54,150.82 74.715,150.82 75.985,152.09 LCD2.22@77.89,152.09 ; LCD2.22@77.459,26.739 ccw(c76.419,25.699) 76.419,27.17 ccw(c76.419,28.641) LCD2.22@77.459,27.601 ; LCD2.22@77.459,68.379 ccw(c76.419,67.339) 76.419,68.81 ccw(c76.419,70.281) LCD2.22@77.459,69.241 ; LCD2.22@77.459,110.019 ccw(c76.419,108.979) 76.419,110.45 ccw(c76.419,111.921) LCD2.22@77.459,110.881 ; LCD2.22@77.459,151.659 ccw(c76.419,150.619) 76.419,152.09 ccw(c76.419,153.561) LCD2.22@77.459,152.521 ; LCD1.22@83.97,26.561 cw(c83.97,25.089) 85.01,26.13 cw(c86.051,27.17) LCD1.22@84.579,27.17 ; LCD1.22@83.97,27.17 85.24,25.9 88.415,25.9 89.685,27.17 LCD2.22@91.59,27.17 ; LCD1.22@83.97,68.2 cw(c83.97,66.729) 85.01,67.77 cw(c86.051,68.81) LCD1.22@84.579,68.81 ; LCD1.22@83.97,68.81 85.24,67.54 88.415,67.54 89.685,68.81 LCD2.22@91.59,68.81 ; LCD1.22@83.97,109.84 cw(c83.97,108.369) 85.01,109.41 cw(c86.051,110.45) LCD1.22@84.579,110.45 ; LCD1.22@83.97,110.45 85.24,109.18 88.415,109.18 89.685,110.45 LCD2.22@91.59,110.45 ; LCD1.22@83.97,151.48 cw(c83.97,150.009) 85.01,151.05 cw(c86.051,152.09) LCD1.22@84.579,152.09 ; LCD1.22@83.97,152.09 85.24,150.82 88.415,150.82 89.685,152.09 LCD2.22@91.59,152.09 ; LCD2.22@91.159,26.739 ccw(c90.119,25.699) 90.119,27.17 ccw(c90.119,28.641) LCD2.22@91.159,27.601 ; LCD2.22@91.159,68.379 ccw(c90.119,67.339) 90.119,68.81 ccw(c90.119,70.281) LCD2.22@91.159,69.241 ; LCD2.22@91.159,110.019 ccw(c90.119,108.979) 90.119,110.45 ccw(c90.119,111.921) LCD2.22@91.159,110.881 ; LCD2.22@91.159,151.659 ccw(c90.119,150.619) 90.119,152.09 ccw(c90.119,153.561) LCD2.22@91.159,152.521 ; LCD1.22@97.67,26.561 cw(c97.67,25.089) 98.71,26.13 cw(c99.751,27.17) LCD1.22@98.279,27.17 ; LCD1.22@97.67,27.17 98.94,25.9 102.115,25.9 103.385,27.17 LCD2.22@105.29,27.17 ; LCD1.22@97.67,68.2 cw(c97.67,66.729) 98.71,67.77 cw(c99.751,68.81) LCD1.22@98.279,68.81 ; LCD1.22@97.67,68.81 98.94,67.54 102.115,67.54 103.385,68.81 LCD2.22@105.29,68.81 ; LCD1.22@97.67,109.84 cw(c97.67,108.369) 98.71,109.41 cw(c99.751,110.45) LCD1.22@98.279,110.45 ; LCD1.22@97.67,110.45 98.94,109.18 102.115,109.18 103.385,110.45 LCD2.22@105.29,110.45 ; LCD1.22@97.67,151.48 cw(c97.67,150.009) 98.71,151.05 cw(c99.751,152.09) LCD1.22@98.279,152.09 ; LCD1.22@97.67,152.09 98.94,150.82 102.115,150.82 103.385,152.09 LCD2.22@105.29,152.09 ; LCD2.22@104.859,26.739 ccw(c103.819,25.699) 103.819,27.17 ccw(c103.819,28.641) LCD2.22@104.859,27.601 ; LCD2.22@104.859,68.379 ccw(c103.819,67.339) 103.819,68.81 ccw(c103.819,70.281) LCD2.22@104.859,69.241 ; LCD2.22@104.859,110.019 ccw(c103.819,108.979) 103.819,110.45 ccw(c103.819,111.921) LCD2.22@104.859,110.881 ; LCD2.22@104.859,151.659 ccw(c103.819,150.619) 103.819,152.09 ccw(c103.819,153.561) LCD2.22@104.859,152.521 ; LCD1.22@111.37,26.561 cw(c111.37,25.089) 112.41,26.13 cw(c113.451,27.17) LCD1.22@111.979,27.17 ; LCD1.22@111.37,27.17 112.64,25.9 115.815,25.9 117.085,27.17 LCD2.22@118.99,27.17 ; LCD1.22@111.37,68.2 cw(c111.37,66.729) 112.41,67.77 cw(c113.451,68.81) LCD1.22@111.979,68.81 ; LCD1.22@111.37,68.81 112.64,67.54 115.815,67.54 117.085,68.81 LCD2.22@118.99,68.81 ; LCD1.22@111.37,109.84 cw(c111.37,108.369) 112.41,109.41 cw(c113.451,110.45) LCD1.22@111.979,110.45 ; LCD1.22@111.37,110.45 112.64,109.18 115.815,109.18 117.085,110.45 LCD2.22@118.99,110.45 ; LCD1.22@111.37,151.48 cw(c111.37,150.009) 112.41,151.05 cw(c113.451,152.09) LCD1.22@111.979,152.09 ; LCD1.22@111.37,152.09 112.64,150.82 115.815,150.82 117.085,152.09 LCD2.22@118.99,152.09 ; LCD2.22@118.559,26.739 ccw(c117.519,25.699) 117.519,27.17 ccw(c117.519,28.641) LCD2.22@118.559,27.601 ; LCD2.22@118.559,68.379 ccw(c117.519,67.339) 117.519,68.81 ccw(c117.519,70.281) LCD2.22@118.559,69.241 ; LCD2.22@118.559,110.019 ccw(c117.519,108.979) 117.519,110.45 ccw(c117.519,111.921) LCD2.22@118.559,110.881 ; LCD2.22@118.559,151.659 ccw(c117.519,150.619) 117.519,152.09 ccw(c117.519,153.561) LCD2.22@118.559,152.521 ; LCD1.22@125.07,26.561 cw(c125.07,25.089) 126.11,26.13 cw(c127.151,27.17) LCD1.22@125.679,27.17 ; LCD1.22@125.07,27.17 126.34,25.9 129.515,25.9 130.785,27.17 LCD2.22@132.69,27.17 ; LCD1.22@125.07,68.2 cw(c125.07,66.729) 126.11,67.77 cw(c127.151,68.81) LCD1.22@125.679,68.81 ; LCD1.22@125.07,68.81 126.34,67.54 129.515,67.54 130.785,68.81 LCD2.22@132.69,68.81 ; LCD1.22@125.07,109.84 cw(c125.07,108.369) 126.11,109.41 cw(c127.151,110.45) LCD1.22@125.679,110.45 ; LCD1.22@125.07,110.45 126.34,109.18 129.515,109.18 130.785,110.45 LCD2.22@132.69,110.45 ; LCD1.22@125.07,151.48 cw(c125.07,150.009) 126.11,151.05 cw(c127.151,152.09) LCD1.22@125.679,152.09 ; LCD1.22@125.07,152.09 126.34,150.82 129.515,150.82 130.785,152.09 LCD2.22@132.69,152.09 ; LCD2.22@132.259,26.739 ccw(c131.219,25.699) 131.219,27.17 ccw(c131.219,28.641) LCD2.22@132.259,27.601 ; LCD2.22@132.259,68.379 ccw(c131.219,67.339) 131.219,68.81 ccw(c131.219,70.281) LCD2.22@132.259,69.241 ; LCD2.22@132.259,110.019 ccw(c131.219,108.979) 131.219,110.45 ccw(c131.219,111.921) LCD2.22@132.259,110.881 ; LCD2.22@132.259,151.659 ccw(c131.219,150.619) 131.219,152.09 ccw(c131.219,153.561) LCD2.22@132.259,152.521
NetLCD1_23: LCD1.23 LCD2.23 | length 531.8
  Top Layer w0.381: LCD1.23@1.77,24.021 cw(c1.77,22.549) 2.81,23.59 cw(c3.851,24.63) LCD1.23@2.379,24.63 ; LCD1.23@1.77,24.63 3.04,23.36 6.215,23.36 7.485,24.63 LCD2.23@9.39,24.63 ; LCD1.23@1.77,65.66 cw(c1.77,64.189) 2.81,65.23 cw(c3.851,66.27) LCD1.23@2.379,66.27 ; LCD1.23@1.77,66.27 3.04,65 6.215,65 7.485,66.27 LCD2.23@9.39,66.27 ; LCD1.23@1.77,107.3 cw(c1.77,105.829) 2.81,106.87 cw(c3.851,107.91) LCD1.23@2.379,107.91 ; LCD1.23@1.77,107.91 3.04,106.64 6.215,106.64 7.485,107.91 LCD2.23@9.39,107.91 ; LCD1.23@1.77,148.94 cw(c1.77,147.469) 2.81,148.51 cw(c3.851,149.55) LCD1.23@2.379,149.55 ; LCD1.23@1.77,149.55 3.04,148.28 6.215,148.28 7.485,149.55 LCD2.23@9.39,149.55 ; LCD2.23@8.959,24.199 ccw(c7.919,23.159) 7.919,24.63 ccw(c7.919,26.101) LCD2.23@8.959,25.061 ; LCD2.23@8.959,65.839 ccw(c7.919,64.799) 7.919,66.27 ccw(c7.919,67.741) LCD2.23@8.959,66.701 ; LCD2.23@8.959,107.479 ccw(c7.919,106.439) 7.919,107.91 ccw(c7.919,109.381) LCD2.23@8.959,108.341 ; LCD2.23@8.959,149.119 ccw(c7.919,148.079) 7.919,149.55 ccw(c7.919,151.021) LCD2.23@8.959,149.981 ; LCD1.23@15.47,24.021 cw(c15.47,22.549) 16.51,23.59 cw(c17.551,24.63) LCD1.23@16.079,24.63 ; LCD1.23@15.47,24.63 16.74,23.36 19.915,23.36 21.185,24.63 LCD2.23@23.09,24.63 ; LCD1.23@15.47,65.66 cw(c15.47,64.189) 16.51,65.23 cw(c17.551,66.27) LCD1.23@16.079,66.27 ; LCD1.23@15.47,66.27 16.74,65 19.915,65 21.185,66.27 LCD2.23@23.09,66.27 ; LCD1.23@15.47,107.3 cw(c15.47,105.829) 16.51,106.87 cw(c17.551,107.91) LCD1.23@16.079,107.91 ; LCD1.23@15.47,107.91 16.74,106.64 19.915,106.64 21.185,107.91 LCD2.23@23.09,107.91 ; LCD1.23@15.47,148.94 cw(c15.47,147.469) 16.51,148.51 cw(c17.551,149.55) LCD1.23@16.079,149.55 ; LCD1.23@15.47,149.55 16.74,148.28 19.915,148.28 21.185,149.55 LCD2.23@23.09,149.55 ; LCD2.23@22.659,24.199 ccw(c21.619,23.159) 21.619,24.63 ccw(c21.619,26.101) LCD2.23@22.659,25.061 ; LCD2.23@22.659,65.839 ccw(c21.619,64.799) 21.619,66.27 ccw(c21.619,67.741) LCD2.23@22.659,66.701 ; LCD2.23@22.659,107.479 ccw(c21.619,106.439) 21.619,107.91 ccw(c21.619,109.381) LCD2.23@22.659,108.341 ; LCD2.23@22.659,149.119 ccw(c21.619,148.079) 21.619,149.55 ccw(c21.619,151.021) LCD2.23@22.659,149.981 ; LCD1.23@29.17,24.021 cw(c29.17,22.549) 30.21,23.59 cw(c31.251,24.63) LCD1.23@29.779,24.63 ; LCD1.23@29.17,24.63 30.44,23.36 33.615,23.36 34.885,24.63 LCD2.23@36.79,24.63 ; LCD1.23@29.17,65.66 cw(c29.17,64.189) 30.21,65.23 cw(c31.251,66.27) LCD1.23@29.779,66.27 ; LCD1.23@29.17,66.27 30.44,65 33.615,65 34.885,66.27 LCD2.23@36.79,66.27 ; LCD1.23@29.17,107.3 cw(c29.17,105.829) 30.21,106.87 cw(c31.251,107.91) LCD1.23@29.779,107.91 ; LCD1.23@29.17,107.91 30.44,106.64 33.615,106.64 34.885,107.91 LCD2.23@36.79,107.91 ; LCD1.23@29.17,148.94 cw(c29.17,147.469) 30.21,148.51 cw(c31.251,149.55) LCD1.23@29.779,149.55 ; LCD1.23@29.17,149.55 30.44,148.28 33.615,148.28 34.885,149.55 LCD2.23@36.79,149.55 ; LCD2.23@36.359,24.199 ccw(c35.319,23.159) 35.319,24.63 ccw(c35.319,26.101) LCD2.23@36.359,25.061 ; LCD2.23@36.359,65.839 ccw(c35.319,64.799) 35.319,66.27 ccw(c35.319,67.741) LCD2.23@36.359,66.701 ; LCD2.23@36.359,107.479 ccw(c35.319,106.439) 35.319,107.91 ccw(c35.319,109.381) LCD2.23@36.359,108.341 ; LCD2.23@36.359,149.119 ccw(c35.319,148.079) 35.319,149.55 ccw(c35.319,151.021) LCD2.23@36.359,149.981 ; LCD1.23@42.87,24.021 cw(c42.87,22.549) 43.91,23.59 cw(c44.951,24.63) LCD1.23@43.479,24.63 ; LCD1.23@42.87,24.63 44.14,23.36 47.315,23.36 48.585,24.63 LCD2.23@50.49,24.63 ; LCD1.23@42.87,65.66 cw(c42.87,64.189) 43.91,65.23 cw(c44.951,66.27) LCD1.23@43.479,66.27 ; LCD1.23@42.87,66.27 44.14,65 47.315,65 48.585,66.27 LCD2.23@50.49,66.27 ; LCD1.23@42.87,107.3 cw(c42.87,105.829) 43.91,106.87 cw(c44.951,107.91) LCD1.23@43.479,107.91 ; LCD1.23@42.87,107.91 44.14,106.64 47.315,106.64 48.585,107.91 LCD2.23@50.49,107.91 ; LCD1.23@42.87,148.94 cw(c42.87,147.469) 43.91,148.51 cw(c44.951,149.55) LCD1.23@43.479,149.55 ; LCD1.23@42.87,149.55 44.14,148.28 47.315,148.28 48.585,149.55 LCD2.23@50.49,149.55 ; LCD2.23@50.059,24.199 ccw(c49.019,23.159) 49.019,24.63 ccw(c49.019,26.101) LCD2.23@50.059,25.061 ; LCD2.23@50.059,65.839 ccw(c49.019,64.799) 49.019,66.27 ccw(c49.019,67.741) LCD2.23@50.059,66.701 ; LCD2.23@50.059,107.479 ccw(c49.019,106.439) 49.019,107.91 ccw(c49.019,109.381) LCD2.23@50.059,108.341 ; LCD2.23@50.059,149.119 ccw(c49.019,148.079) 49.019,149.55 ccw(c49.019,151.021) LCD2.23@50.059,149.981 ; LCD1.23@56.57,24.021 cw(c56.57,22.549) 57.61,23.59 cw(c58.651,24.63) LCD1.23@57.179,24.63 ; LCD1.23@56.57,24.63 57.84,23.36 61.015,23.36 62.285,24.63 LCD2.23@64.19,24.63 ; LCD1.23@56.57,65.66 cw(c56.57,64.189) 57.61,65.23 cw(c58.651,66.27) LCD1.23@57.179,66.27 ; LCD1.23@56.57,66.27 57.84,65 61.015,65 62.285,66.27 LCD2.23@64.19,66.27 ; LCD1.23@56.57,107.3 cw(c56.57,105.829) 57.61,106.87 cw(c58.651,107.91) LCD1.23@57.179,107.91 ; LCD1.23@56.57,107.91 57.84,106.64 61.015,106.64 62.285,107.91 LCD2.23@64.19,107.91 ; LCD1.23@56.57,148.94 cw(c56.57,147.469) 57.61,148.51 cw(c58.651,149.55) LCD1.23@57.179,149.55 ; LCD1.23@56.57,149.55 57.84,148.28 61.015,148.28 62.285,149.55 LCD2.23@64.19,149.55 ; LCD2.23@63.759,24.199 ccw(c62.719,23.159) 62.719,24.63 ccw(c62.719,26.101) LCD2.23@63.759,25.061 ; LCD2.23@63.759,65.839 ccw(c62.719,64.799) 62.719,66.27 ccw(c62.719,67.741) LCD2.23@63.759,66.701 ; LCD2.23@63.759,107.479 ccw(c62.719,106.439) 62.719,107.91 ccw(c62.719,109.381) LCD2.23@63.759,108.341 ; LCD2.23@63.759,149.119 ccw(c62.719,148.079) 62.719,149.55 ccw(c62.719,151.021) LCD2.23@63.759,149.981 ; LCD1.23@70.27,24.021 cw(c70.27,22.549) 71.31,23.59 cw(c72.351,24.63) LCD1.23@70.879,24.63 ; LCD1.23@70.27,24.63 71.54,23.36 74.715,23.36 75.985,24.63 LCD2.23@77.89,24.63 ; LCD1.23@70.27,65.66 cw(c70.27,64.189) 71.31,65.23 cw(c72.351,66.27) LCD1.23@70.879,66.27 ; LCD1.23@70.27,66.27 71.54,65 74.715,65 75.985,66.27 LCD2.23@77.89,66.27 ; LCD1.23@70.27,107.3 cw(c70.27,105.829) 71.31,106.87 cw(c72.351,107.91) LCD1.23@70.879,107.91 ; LCD1.23@70.27,107.91 71.54,106.64 74.715,106.64 75.985,107.91 LCD2.23@77.89,107.91 ; LCD1.23@70.27,148.94 cw(c70.27,147.469) 71.31,148.51 cw(c72.351,149.55) LCD1.23@70.879,149.55 ; LCD1.23@70.27,149.55 71.54,148.28 74.715,148.28 75.985,149.55 LCD2.23@77.89,149.55 ; LCD2.23@77.459,24.199 ccw(c76.419,23.159) 76.419,24.63 ccw(c76.419,26.101) LCD2.23@77.459,25.061 ; LCD2.23@77.459,65.839 ccw(c76.419,64.799) 76.419,66.27 ccw(c76.419,67.741) LCD2.23@77.459,66.701 ; LCD2.23@77.459,107.479 ccw(c76.419,106.439) 76.419,107.91 ccw(c76.419,109.381) LCD2.23@77.459,108.341 ; LCD2.23@77.459,149.119 ccw(c76.419,148.079) 76.419,149.55 ccw(c76.419,151.021) LCD2.23@77.459,149.981 ; LCD1.23@83.97,24.021 cw(c83.97,22.549) 85.01,23.59 cw(c86.051,24.63) LCD1.23@84.579,24.63 ; LCD1.23@83.97,24.63 85.24,23.36 88.415,23.36 89.685,24.63 LCD2.23@91.59,24.63 ; LCD1.23@83.97,65.66 cw(c83.97,64.189) 85.01,65.23 cw(c86.051,66.27) LCD1.23@84.579,66.27 ; LCD1.23@83.97,66.27 85.24,65 88.415,65 89.685,66.27 LCD2.23@91.59,66.27 ; LCD1.23@83.97,107.3 cw(c83.97,105.829) 85.01,106.87 cw(c86.051,107.91) LCD1.23@84.579,107.91 ; LCD1.23@83.97,107.91 85.24,106.64 88.415,106.64 89.685,107.91 LCD2.23@91.59,107.91 ; LCD1.23@83.97,148.94 cw(c83.97,147.469) 85.01,148.51 cw(c86.051,149.55) LCD1.23@84.579,149.55 ; LCD1.23@83.97,149.55 85.24,148.28 88.415,148.28 89.685,149.55 LCD2.23@91.59,149.55 ; LCD2.23@91.159,24.199 ccw(c90.119,23.159) 90.119,24.63 ccw(c90.119,26.101) LCD2.23@91.159,25.061 ; LCD2.23@91.159,65.839 ccw(c90.119,64.799) 90.119,66.27 ccw(c90.119,67.741) LCD2.23@91.159,66.701 ; LCD2.23@91.159,107.479 ccw(c90.119,106.439) 90.119,107.91 ccw(c90.119,109.381) LCD2.23@91.159,108.341 ; LCD2.23@91.159,149.119 ccw(c90.119,148.079) 90.119,149.55 ccw(c90.119,151.021) LCD2.23@91.159,149.981 ; LCD1.23@97.67,24.021 cw(c97.67,22.549) 98.71,23.59 cw(c99.751,24.63) LCD1.23@98.279,24.63 ; LCD1.23@97.67,24.63 98.94,23.36 102.115,23.36 103.385,24.63 LCD2.23@105.29,24.63 ; LCD1.23@97.67,65.66 cw(c97.67,64.189) 98.71,65.23 cw(c99.751,66.27) LCD1.23@98.279,66.27 ; LCD1.23@97.67,66.27 98.94,65 102.115,65 103.385,66.27 LCD2.23@105.29,66.27 ; LCD1.23@97.67,107.3 cw(c97.67,105.829) 98.71,106.87 cw(c99.751,107.91) LCD1.23@98.279,107.91 ; LCD1.23@97.67,107.91 98.94,106.64 102.115,106.64 103.385,107.91 LCD2.23@105.29,107.91 ; LCD1.23@97.67,148.94 cw(c97.67,147.469) 98.71,148.51 cw(c99.751,149.55) LCD1.23@98.279,149.55 ; LCD1.23@97.67,149.55 98.94,148.28 102.115,148.28 103.385,149.55 LCD2.23@105.29,149.55 ; LCD2.23@104.859,24.199 ccw(c103.819,23.159) 103.819,24.63 ccw(c103.819,26.101) LCD2.23@104.859,25.061 ; LCD2.23@104.859,65.839 ccw(c103.819,64.799) 103.819,66.27 ccw(c103.819,67.741) LCD2.23@104.859,66.701 ; LCD2.23@104.859,107.479 ccw(c103.819,106.439) 103.819,107.91 ccw(c103.819,109.381) LCD2.23@104.859,108.341 ; LCD2.23@104.859,149.119 ccw(c103.819,148.079) 103.819,149.55 ccw(c103.819,151.021) LCD2.23@104.859,149.981 ; LCD1.23@111.37,24.021 cw(c111.37,22.549) 112.41,23.59 cw(c113.451,24.63) LCD1.23@111.979,24.63 ; LCD1.23@111.37,24.63 112.64,23.36 115.815,23.36 117.085,24.63 LCD2.23@118.99,24.63 ; LCD1.23@111.37,65.66 cw(c111.37,64.189) 112.41,65.23 cw(c113.451,66.27) LCD1.23@111.979,66.27 ; LCD1.23@111.37,66.27 112.64,65 115.815,65 117.085,66.27 LCD2.23@118.99,66.27 ; LCD1.23@111.37,107.3 cw(c111.37,105.829) 112.41,106.87 cw(c113.451,107.91) LCD1.23@111.979,107.91 ; LCD1.23@111.37,107.91 112.64,106.64 115.815,106.64 117.085,107.91 LCD2.23@118.99,107.91 ; LCD1.23@111.37,148.94 cw(c111.37,147.469) 112.41,148.51 cw(c113.451,149.55) LCD1.23@111.979,149.55 ; LCD1.23@111.37,149.55 112.64,148.28 115.815,148.28 117.085,149.55 LCD2.23@118.99,149.55 ; LCD2.23@118.559,24.199 ccw(c117.519,23.159) 117.519,24.63 ccw(c117.519,26.101) LCD2.23@118.559,25.061 ; LCD2.23@118.559,65.839 ccw(c117.519,64.799) 117.519,66.27 ccw(c117.519,67.741) LCD2.23@118.559,66.701 ; LCD2.23@118.559,107.479 ccw(c117.519,106.439) 117.519,107.91 ccw(c117.519,109.381) LCD2.23@118.559,108.341 ; LCD2.23@118.559,149.119 ccw(c117.519,148.079) 117.519,149.55 ccw(c117.519,151.021) LCD2.23@118.559,149.981 ; LCD1.23@125.07,24.021 cw(c125.07,22.549) 126.11,23.59 cw(c127.151,24.63) LCD1.23@125.679,24.63 ; LCD1.23@125.07,24.63 126.34,23.36 129.515,23.36 130.785,24.63 LCD2.23@132.69,24.63 ; LCD1.23@125.07,65.66 cw(c125.07,64.189) 126.11,65.23 cw(c127.151,66.27) LCD1.23@125.679,66.27 ; LCD1.23@125.07,66.27 126.34,65 129.515,65 130.785,66.27 LCD2.23@132.69,66.27 ; LCD1.23@125.07,107.3 cw(c125.07,105.829) 126.11,106.87 cw(c127.151,107.91) LCD1.23@125.679,107.91 ; LCD1.23@125.07,107.91 126.34,106.64 129.515,106.64 130.785,107.91 LCD2.23@132.69,107.91 ; LCD1.23@125.07,148.94 cw(c125.07,147.469) 126.11,148.51 cw(c127.151,149.55) LCD1.23@125.679,149.55 ; LCD1.23@125.07,149.55 126.34,148.28 129.515,148.28 130.785,149.55 LCD2.23@132.69,149.55 ; LCD2.23@132.259,24.199 ccw(c131.219,23.159) 131.219,24.63 ccw(c131.219,26.101) LCD2.23@132.259,25.061 ; LCD2.23@132.259,65.839 ccw(c131.219,64.799) 131.219,66.27 ccw(c131.219,67.741) LCD2.23@132.259,66.701 ; LCD2.23@132.259,107.479 ccw(c131.219,106.439) 131.219,107.91 ccw(c131.219,109.381) LCD2.23@132.259,108.341 ; LCD2.23@132.259,149.119 ccw(c131.219,148.079) 131.219,149.55 ccw(c131.219,151.021) LCD2.23@132.259,149.981